# Altium PCB PCB2.PcbDoc
Units mm, origin at the board's own origin, x right, y up, seen from the top; angles counter-clockwise.
Board outline 85 x 56 mm, 2 copper layers (Top Layer, Bottom Layer), stack 1.601 mm thick; 12 components, 18 nets, 87 pads, 8 vias.
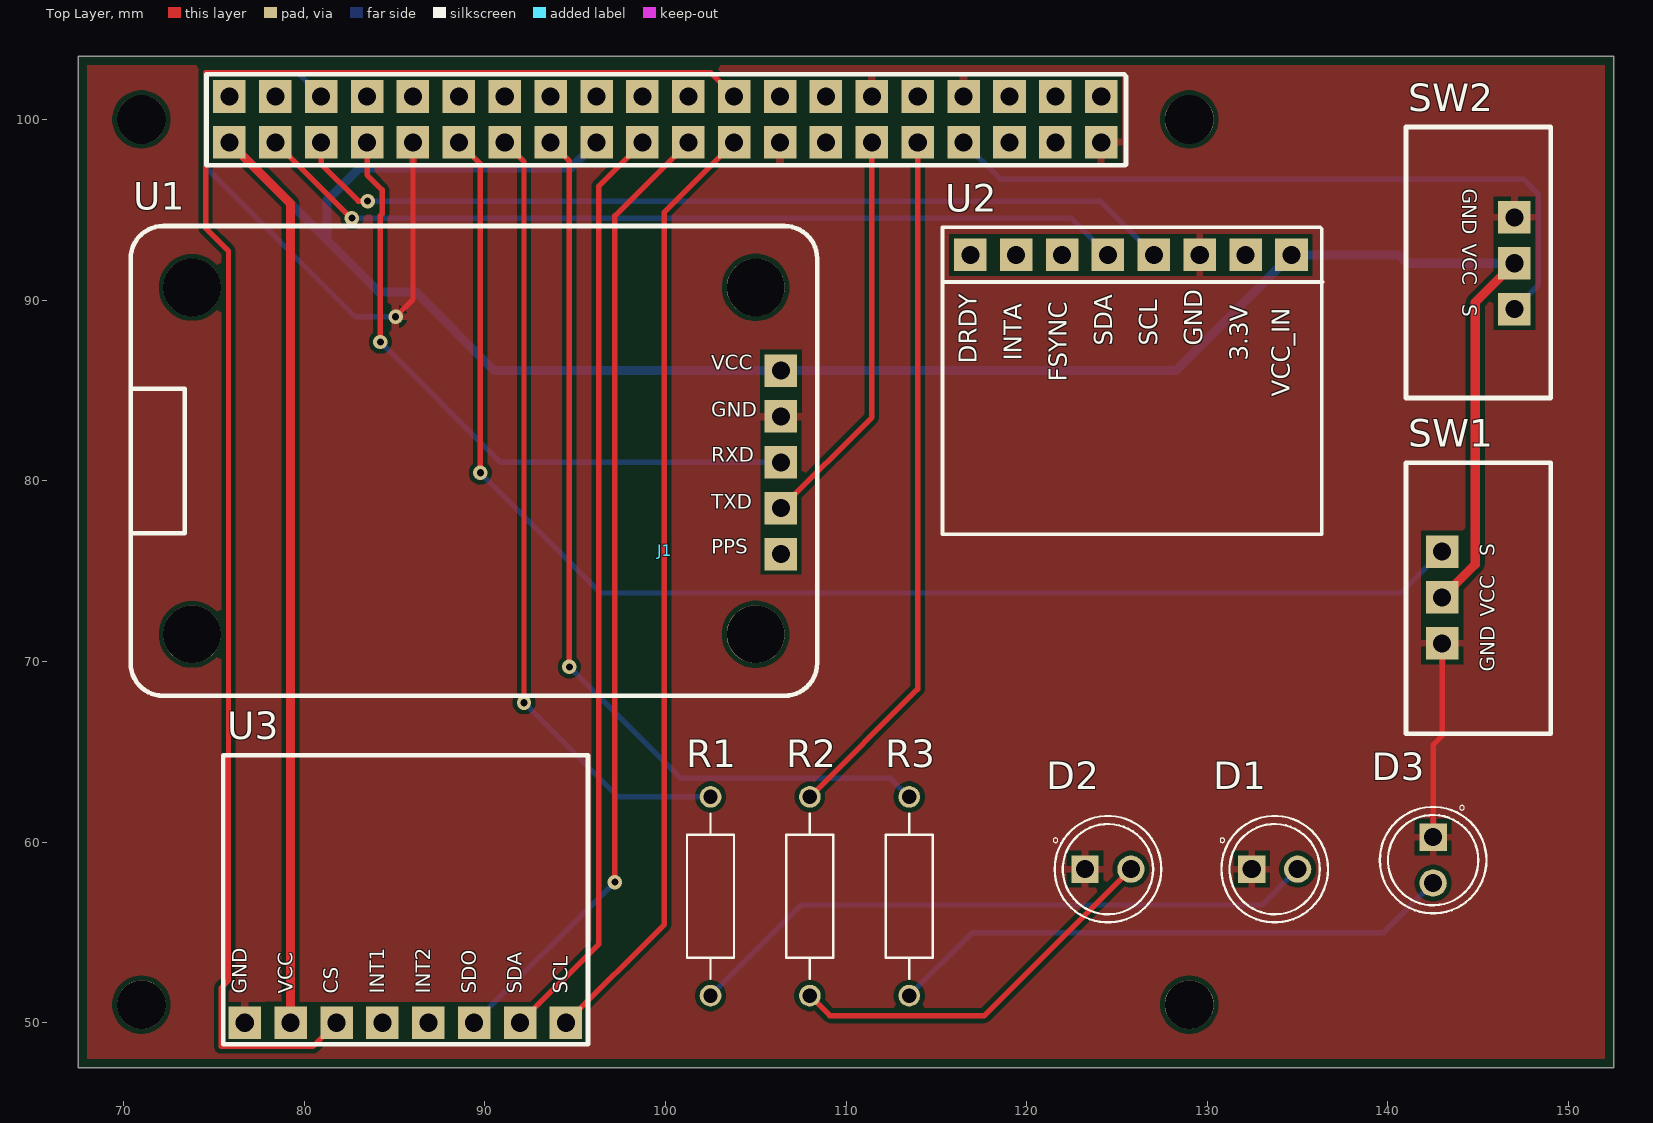
[diagram p0: Top Layer view]
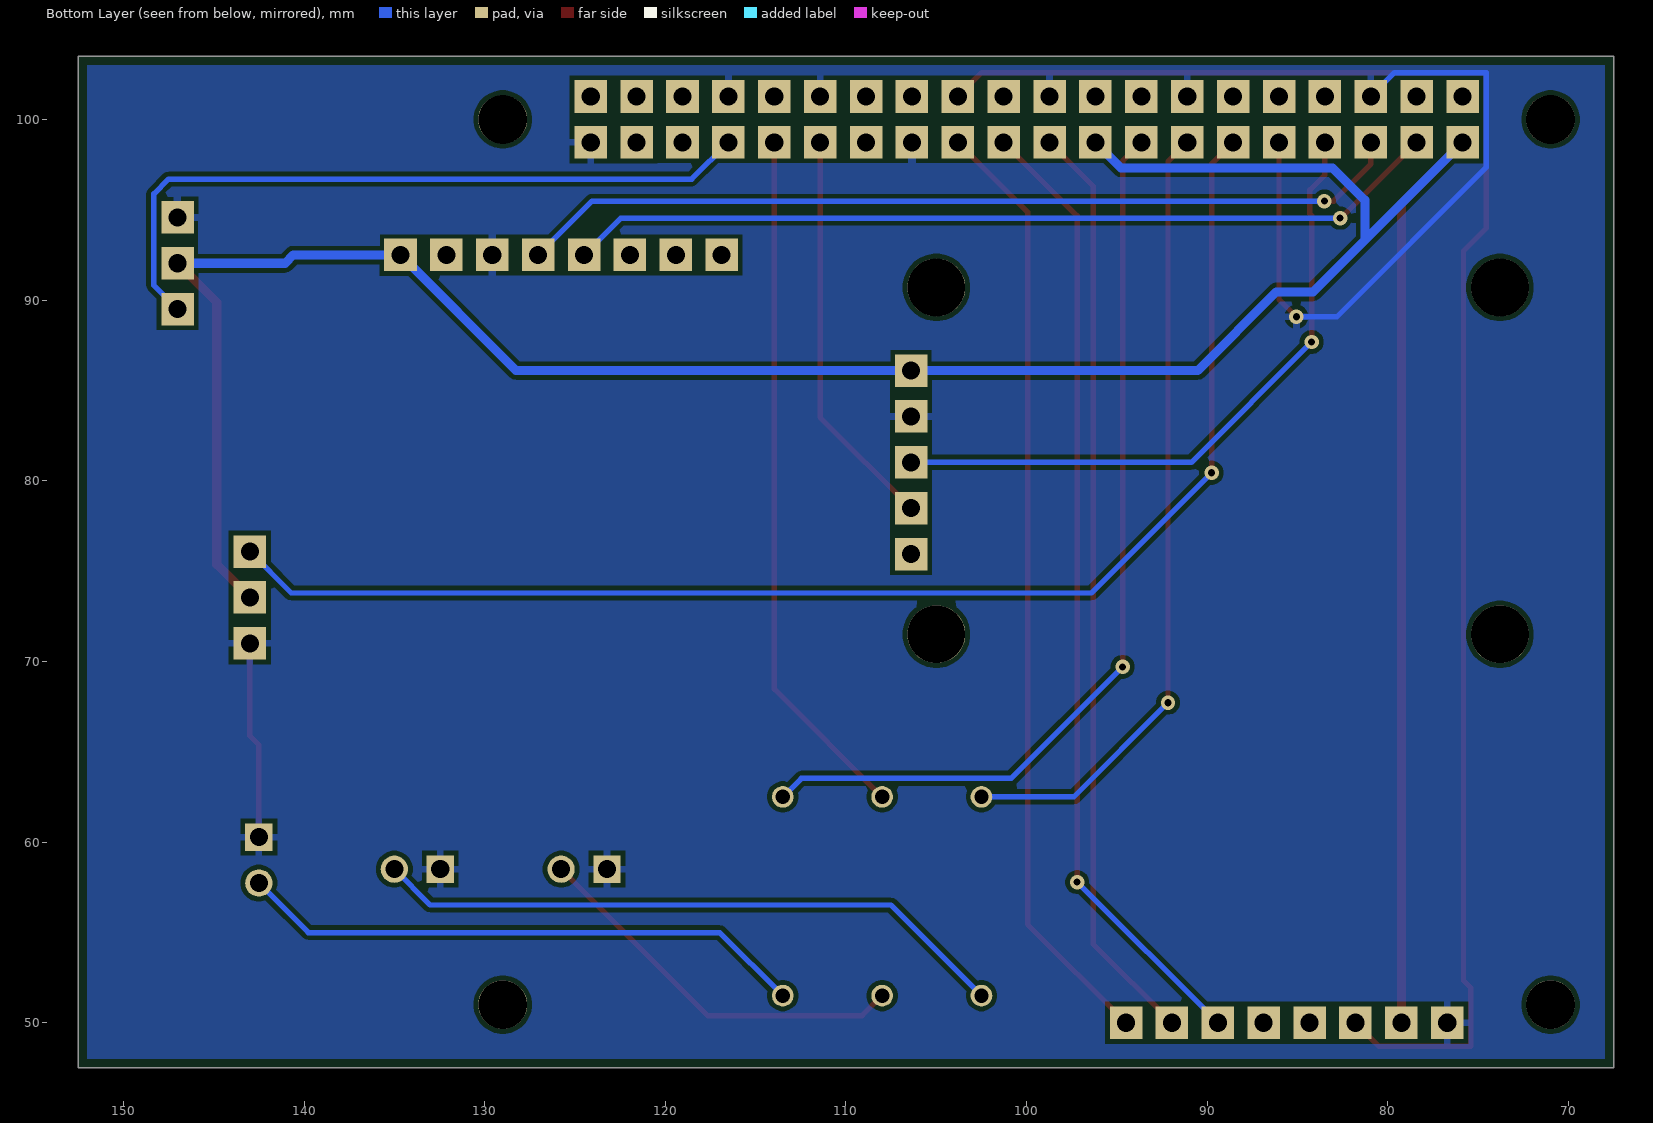
[diagram p1: Bottom Layer view, seen from below]
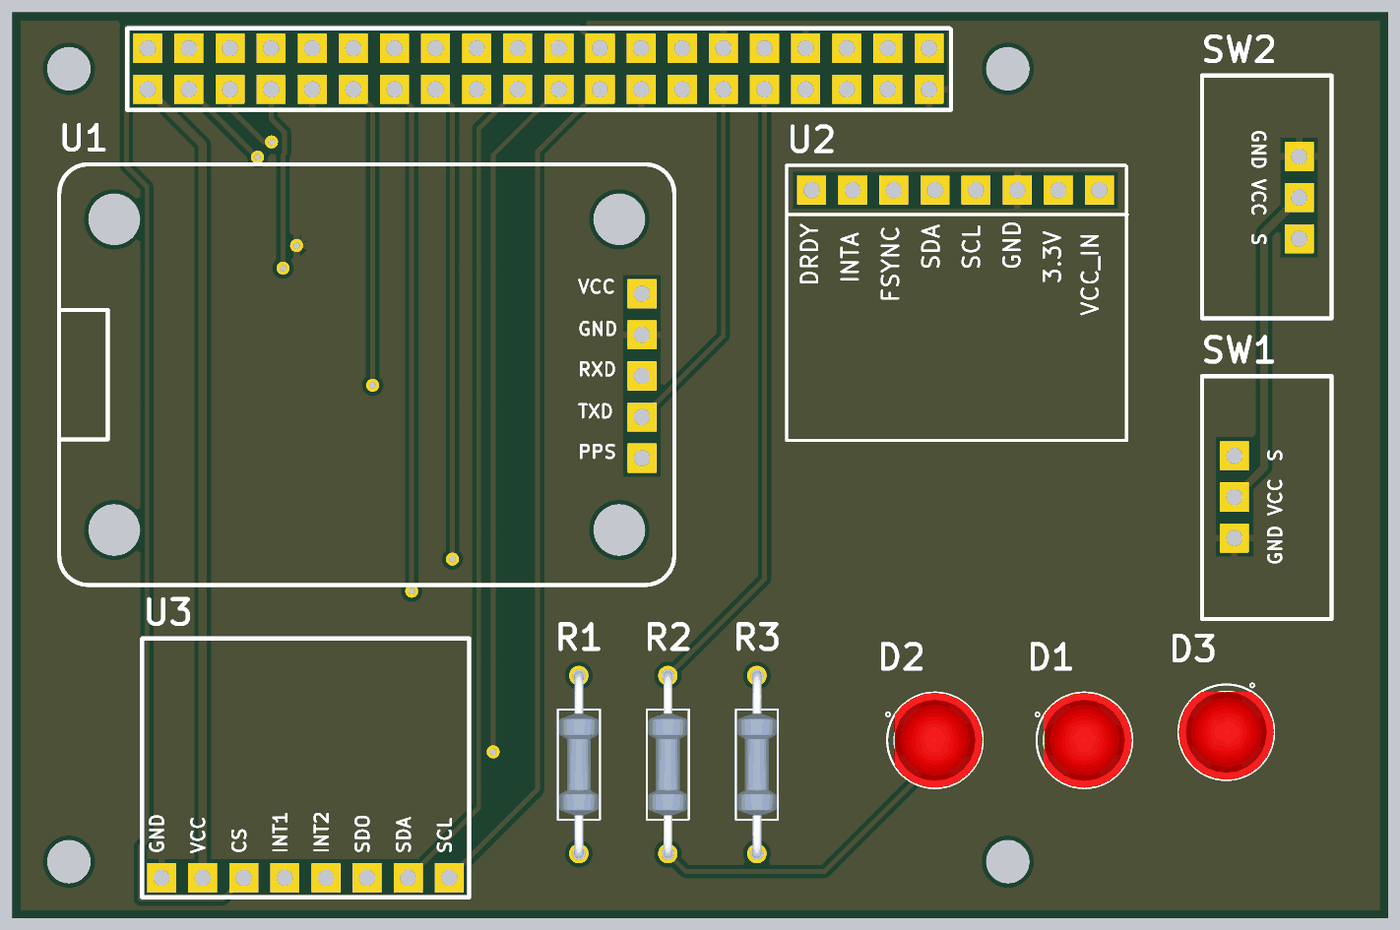
[diagram p2: 3D render of the assembled board from above, using the file's embedded part models]

## Layer stack, top to bottom
Top Solder: solder mask 0.0102, Solder Resist, Dk 3.5
Top Layer: signal copper 0.0356
Dielectric 1: dielectric 1.53, FR-4, Dk 4.8
Bottom Layer: signal copper 0.0356
Bottom Solder: solder mask 0.0102, Solder Resist, Dk 3.5

## Board outline
67.5,47.5 67.5,103.5 152.5,103.5 152.5,47.5

## Design rules (kind name [scope] priority, off if disabled: settings)
BoardOutlineClearance [All] p1: gap=0.254 ignorepadtopadclearanceinfootprint=FALSE except(0: Arc-SplitContinuation Track-SplitContinuation SMDPad-SplitContinuation THPad-SplitContinuation Via-SplitContinuation Fill-SplitContinuation Poly-SplitContinuation Region-SplitContinuation Text-SplitContinuation; 0.3: Arc-OutlineEdge Track-OutlineEdge SMDPad-OutlineEdge THPad-OutlineEdge Via-OutlineEdge Fill-OutlineEdge Region-OutlineEdge Text-OutlineEdge; 0.5: Poly-OutlineEdge)
Clearance [All] p1: gap=0.254 ignorepadtopadclearanceinfootprint=FALSE
ComponentClearance [All] p1 off: gap=0.254 collisioncheckmode=3 verticalgap=0.254 showdistances=FALSE
HoleSize [All] p1: absolutevalues=TRUE maxlimit=3.5 minlimit=0.025 maxpercent=80.000 minpercent=20.000
PolygonConnect [All] p1: connectstyle=Relief reliefconductorwidth=0.4 reliefentries=4 polygonreliefangle="90 Angle" airgapwidth=0.254
RoutingVias [All] p1: holewidth=0.4 width=0.8 viastyle="Through Hole" minholewidth=0.3 minwidth=0.6 maxholewidth=0.5 maxwidth=1
SilkToSolderMaskClearance [IsPad] p1: minsilkscreentomaskgap=0.15 clearancetoexposedcopper=TRUE
SolderMaskExpansion [All] p1: expansion=0 istentingtop=FALSE
SupplyNets "Schematic Supply Nets" [InNet('GND')] p1: voltage=0.000
Width Width_Power [InNet('VCC')] p1: maxlimit=1 minlimit=0.3 preferedwidth=0.5 minimp=50.000000 maximp=50.000000 favimp=50.000000
Width [All] p2: maxlimit=0.75 minlimit=0.25 preferedwidth=0.3 minimp=50.000000 maximp=50.000000 favimp=50.000000
27 further rules are at their usual default settings.

## Components (designator, comment, footprint, x,y, rotation, side; value= is the part's Value field where it differs from the comment)
D1 "LED" LED 133.73,58.5 r0 top
D2 "LED" LED 124.5,58.5 r0 top
D3 "LED" LED 142.5,59 r270 top
J1 "PI5" PI5 100,100 r0 top
R1 "220R" Resistor 102.5,57 r90 top
R2 "220R" Resistor 108,57 r90 top
R3 "100R" Resistor 113.5,57 r90 top
SW1 "HW-483" HW-483 143,71 r90 top
SW2 "HW-483" HW-483 147,94.58 r270 top
U1 "HW-623" HW-623 106.4,86.1 r270 top
U2 "HW-290" HW-290 116.88,92.5 r0 top
U3 "GY-291" GY-291 76.72,50 r90 top

## Footprints (in the part's own frame and the unit in brackets; to place one, negate y for a bottom-side part, rotate by r counter-clockwise, add the part's x,y. Pads: shape width x height; smd on the part's side, far side on the other; paste and mask are expansions set on the pad)
GY-291 [mm]
  rect 1.8x1.8 hole 1: 1(0,0) 2(0,-2.54) 3(0,-5.08) 4(0,-7.62) 5(0,-10.16) 6(0,-12.7) 7(0,-15.24) 8(0,-17.78)
  silkscreen extent -1.2,-19 14.8,1.2
HW-290 [mm] "HW-290 module, 8 pin, 2.54mm"
  rect 1.8x1.8 hole 1: 1(0,0) 2(2.54,0) 3(5.08,0) 4(7.62,0) 5(10.16,0) 6(12.7,0) 7(15.24,0) 8(17.78,0)
  silkscreen extent -1.54,-15.46 19.5,1.54
HW-483 [mm] "3 pin button. Left pin - GND, central pin - VCC, right pin - SIGNAL"
  rect 1.8x1.8 hole 1: 1(0,0) 2(2.54,0) 3(5.08,0)
  silkscreen extent -5,-6 10,2
HW-623 [mm] "GPS module"
  rect 1.8x1.8 hole 1: 1(0,0) 2(2.54,0) 3(5.08,0) 4(7.62,0) 5(10.16,0)
  round 3.2 hole 3.2 unplated: 13(-4.6,-1.4) 14(14.6,-1.4) 15(-4.6,-32.6) 16(14.6,-32.6)
  silkscreen extent -8,-36 18,2
LED [mm]
  round 1.508 hole 1: A(1.27,0)
  rect 1.508x1.508 / inner round 1.508 / far side rect 1.508x1.508 hole 1: C(-1.27,0)
  silkscreen extent -3.03,-2.95 2.95,2.95, body extent -2.5,-2.95 2.95,2.95, height 9.6
PI5 [mm]
  rect 1.8x1.8 hole 1: 1(-24.13,-1.27) 2(-24.13,1.27) 3(-21.59,-1.27) 4(-21.59,1.27) 5(-19.05,-1.27) 6(-19.05,1.27) 7(-16.51,-1.27) 8(-16.51,1.27) 9(-13.97,-1.27) 10(-13.97,1.27) 11(-11.43,-1.27) 12(-11.43,1.27) 13(-8.89,-1.27) 14(-8.89,1.27) 15(-6.35,-1.27) 16(-6.35,1.27) 17(-3.81,-1.27) 18(-3.81,1.27) 19(-1.27,-1.27) 20(-1.27,1.27) 21(1.27,-1.27) 22(1.27,1.27) 23(3.81,-1.27) 24(3.81,1.27) 25(6.35,-1.27) 26(6.35,1.27) 27(8.89,-1.27) 28(8.89,1.27) 29(11.43,-1.27) 30(11.43,1.27) 31(13.97,-1.27) 32(13.97,1.27) 33(16.51,-1.27) 34(16.51,1.27) 35(19.05,-1.27) 36(19.05,1.27) 37(21.59,-1.27) 38(21.59,1.27) 39(24.13,-1.27) 40(24.13,1.27)
  round 2.7 hole 2.7 unplated: 41(-29,0) 42(29,0) 43(-29,-49) 44(29,-49)
  silkscreen extent -25.4,-2.54 25.5,2.5, body extent -25.4,-2.54 25.4,2.54
Resistor [mm]
  round 1.2 hole 0.8: 1(-5.5,0) 2(5.5,0)
  silkscreen extent -4.58,-1.3 4.58,1.3, body extent -5.77,-1.2 5.77,1.2, height 2.4

## Part data
R1 R2 R3: library part Resistor
U2: library part HW290_GY87

## Via types
v1: diameter 0.8, hole 0.4, Top Layer to Bottom Layer, 8 vias

## Nets (pads, with @x,y where several pads share a name; then routed paths per layer and width w, separated by ;. In a path a pad name is that pad's centre, name@x,y a point inside that pad or via, vN(x,y) a via of type N, cw(c..) or ccw(c..) an arc to the next point about the centre after c; other vN are vias at no path point)
BTN: J1.11 SW1.3 | length 75.7
  Top Layer w0.3: J1.11 89.764,97.536 v1(89.764,80.442)
  Bottom Layer w0.3: v1(89.764,80.442) 96.418,73.787 140.707,73.787 SW1.3
BTN2: J1.33 SW2.3 | length 39.9
  Bottom Layer w0.3: J1.33 118.542,96.698 147.498,96.698 148.311,95.885 148.311,90.811 SW2.3
GND: D1.C D2.C D3.C J1.6 J1.9 J1.14 J1.20 J1.25 J1.30 J1.34 J1.39 SW1.1 SW2.1 U1.2 U2.6 U3.1 | length 47.1
  Top Layer w0.3: v1(85.065,89.078) 86.03,90.043 J1.9 ; D3.C 142.5,65.38 143,65.88 SW1.1
  Bottom Layer w0.3: J1.6 79.629,102.591 74.549,102.591 74.549,97.358 82.829,89.078 v1(85.065,89.078)
I2C_SCL: J1.5 U2.5 | length 49.4
  Top Layer w0.3: J1.5 80.95,97.536 83.007,95.479 v1(83.515,95.479)
  Bottom Layer w0.3: v1(83.515,95.479) 124.061,95.479 U2.5
I2C_SDA: J1.3 U2.4 | length 48.7
  Top Layer w0.3: J1.3 82.601,94.539 v1(82.652,94.539)
  Bottom Layer w0.3: v1(82.652,94.539) 122.461,94.539 U2.4
LED_B: J1.31 R2.2 | length 38.7
  Top Layer w0.3: R2.2 113.97,68.47 J1.31
LED_G: J1.15 R3.2 | length 51.3
  Top Layer w0.3: J1.15 94.691,97.689 v1(94.691,69.698)
  Bottom Layer w0.3: v1(94.691,69.698) 100.863,63.525 112.475,63.525 R3.2
LED_R: J1.13 R1.2 | length 43.9
  Top Layer w0.3: J1.13 92.177,97.663 v1(92.177,67.716)
  Bottom Layer w0.3: v1(92.177,67.716) 97.393,62.5 R1.2
NetD1_A: D1.A R1.1 | length 35.4
  Bottom Layer w0.3: R1.1 107.515,56.515 133.015,56.515 D1.A@135,58.5
NetD2_A: D2.A R2.1 | length 21.6
  Top Layer w0.3: R2.1 109.106,50.394 117.664,50.394 D2.A@125.77,58.5
NetD3_A: D3.A R3.1 | length 31.6
  Bottom Layer w0.3: R3.1 116.991,54.991 139.761,54.991 D3.A
SPI_CS0: J1.24 U3.3 | length 91.3
  Top Layer w0.3: U3.3 80.492,48.692 75.413,48.692 75.413,51.918 75.819,52.324 75.819,92.71 74.549,93.98 74.549,102.591 102.489,102.591 J1.24
SPI_MISO: J1.21 U3.6 | length 53.6
  Top Layer w0.3: v1(97.206,57.786) 97.206,94.666 J1.21
  Bottom Layer w0.3: U3.6 v1(97.206,57.786)
SPI_MOSI: J1.19 U3.7 | length 51.5
  Top Layer w0.3: U3.7 96.317,54.357 96.317,96.317 J1.19
SPI_SCLK: J1.23 U3.8 | length 52.6
  Top Layer w0.3: U3.8 99.949,55.449 99.949,94.869 J1.23
UART_RX: J1.29 U1.4 | length 22.3
  Top Layer w0.3: U1.4 111.43,83.51 J1.29
UART_TX: J1.7 U1.3 | length 36.4
  Top Layer w0.3: J1.7 83.49,96.926 84.319,96.097 84.319,94.767 84.226,94.675 v1(84.226,87.681)
  Bottom Layer w0.3: v1(84.226,87.681) 90.887,81.02 U1.3
VCC: J1.1 J1.17 SW1.2 SW2.2 U1.1 U2.8 U3.2 | length 167.9
  Top Layer w0.5: J1.1 79.26,95.34 U3.2 ; SW1.2 144.831,75.371 144.831,89.871 SW2.2
  Bottom Layer w0.5: J1.1 81.28,93.32 ; J1.17 94.767,97.307 83.059,97.307 81.28,95.528 81.28,93.32 ; SW2.2 141.049,92.04 140.589,92.5 U2.8 128.26,86.1 U1.1 90.541,86.1 86.181,90.461 84.139,90.461 81.28,93.32
pads on no net: J1.2 J1.4 J1.8 J1.10 J1.12 J1.16 J1.18 J1.22 J1.26 J1.27 J1.28 J1.32 J1.35 J1.36 J1.37 J1.38 J1.40 J1.41 J1.42 J1.43 J1.44 U1.5 U1.13 U1.14 U1.15 U1.16 U2.1 U2.2 U2.3 U2.7 U3.4 U3.5

## Polygon pours and split planes (outlines as drawn)
GND on Top Layer "GND_L01_P001" (solid, remove dead copper, pour order 1): 67.5,103.5 152.5,103.5 152.5,47.5 67.5,47.5
GND on Bottom Layer "GND_L02_P003" (solid, remove dead copper, pour order 3): 67.5,57 67.5,103.5 152.5,103.5 152.5,47.5 67.5,47.5

## Silkscreen, mask and mechanical layers (free items; w line width, h text height)
Mechanical 1:
  the board outline again, w0.254

## Text inside footprints (layer, text, board x,y; h text height)
SW1: Top Overlay "VCC" at 145.898,72.474 h0.8 r90; Top Overlay "S" at 145.898,75.813 h0.8 r90; Top Overlay "GND" at 145.898,69.426 h0.8 r90
SW2: Top Overlay "VCC" at 144.102,93.106 h0.8 r270; Top Overlay "S" at 144.102,89.767 h0.8 r270; Top Overlay "GND" at 144.102,96.154 h0.8 r270
U1: Top Overlay "PPS" at 102.534,75.95 h0.8; Top Overlay "TXD" at 102.534,78.45 h0.8; Top Overlay "RXD" at 102.534,81.05 h0.8; Top Overlay "GND" at 102.534,83.55 h0.8; Top Overlay "VCC" at 102.534,86.15 h0.8
U2: Top Overlay "VCC_IN" at 134.563,84.65 h1 r90; Top Overlay "3.3V" at 132.23,86.649 h1 r90; Top Overlay "GND" at 129.73,87.482 h1 r90; Top Overlay "SCL" at 127.23,87.482 h1 r90; Top Overlay "SDA" at 124.73,87.482 h1 r90; Top Overlay "FSYNC" at 122.23,85.483 h1 r90; Top Overlay "INTA" at 119.73,86.649 h1 r90; Top Overlay "DRDY" at 117.23,86.483 h1 r90
U3: Top Overlay "GND" at 76.824,51.595 h0.8 r90; Top Overlay "VCC" at 79.364,51.595 h0.8 r90; Top Overlay "CS" at 81.904,51.595 h0.8 r90; Top Overlay "INT1" at 84.444,51.595 h0.8 r90; Top Overlay "INT2" at 86.984,51.595 h0.8 r90; Top Overlay "SDO" at 89.524,51.595 h0.8 r90; Top Overlay "SDA" at 92.064,51.595 h0.8 r90; Top Overlay "SCL" at 94.604,51.595 h0.8 r90